# Altium PCB BAILEY.PcbDoc (part 6 of 8)
Units mil, origin at the board's own origin, x right, y up, seen from the top; angles counter-clockwise.
Board outline 6100 x 3000 mil, 4 copper layers (Signal Layer 1, Signal Layer 2, Signal Layer 3, Signal Layer 4), stack 59.904 mil thick; 167 components, 96 nets, 718 pads, 2907 vias.
Unrouted connection lines stored in the file: 1.
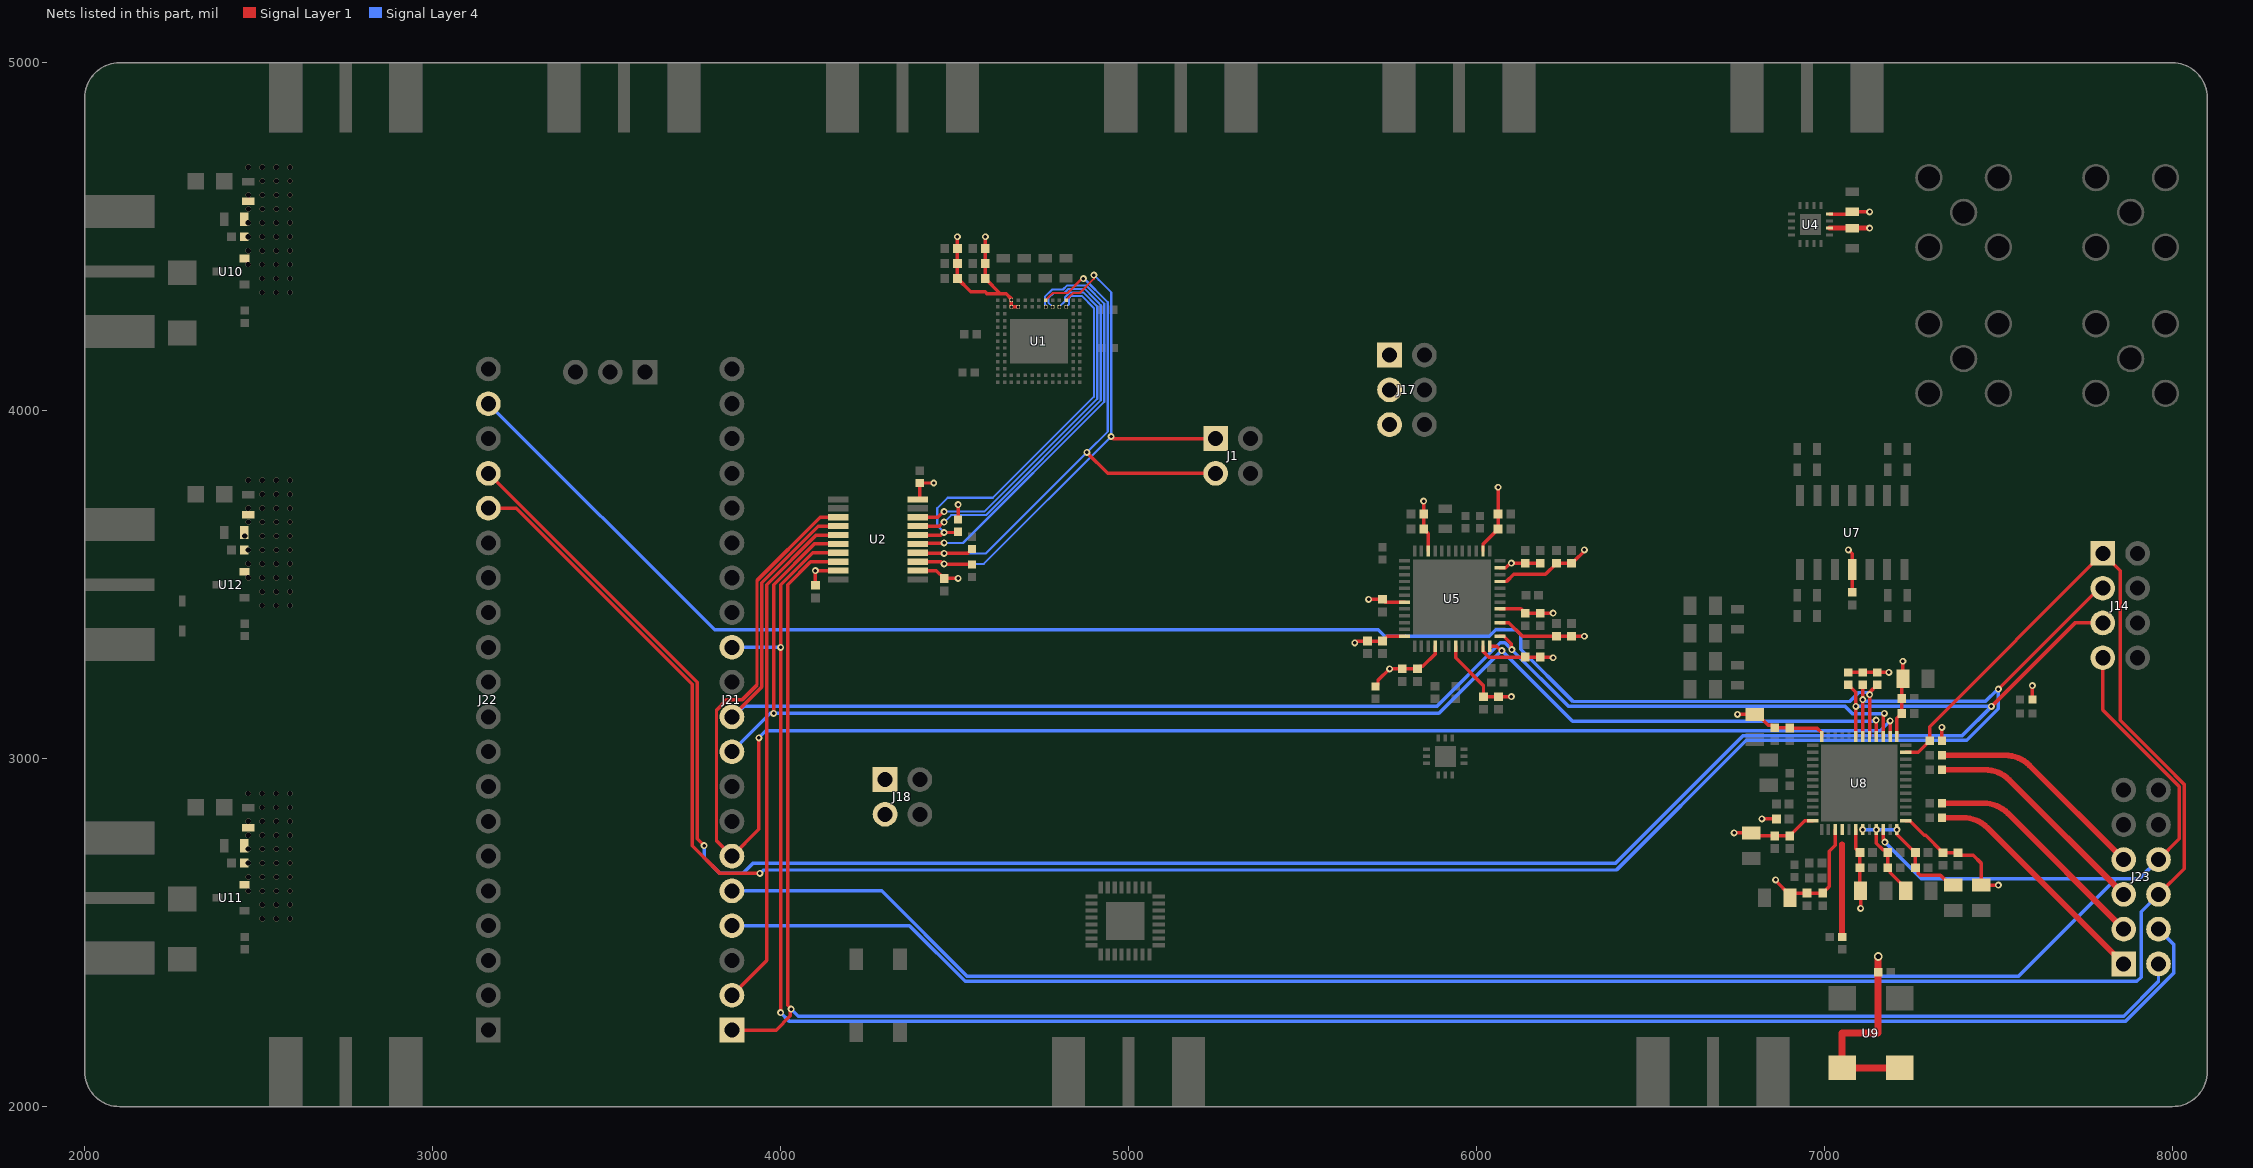
[diagram p4: the nets of this part, all layers, seen from the top]

## Part data (continued)
U3: "Splitter And Combiner, 0MHz Min, 18000MHz Max, 3.9dB Insertion Loss-Max, GAAS", Clock Frequency=18GHz, Manufacturer=Mini-Circuits, Max Operating Temperature=105°C, Min Operating Temperature=-55°C, Supplier Part Number=3157-EP2RKU+CT-ND, Bandwidth=18GHz, Category="NFC / RFID Components", ComponentLink1Description=https://datasheet.octopart.com:443/EP2RKU%2B-Mini-Circuits-datasheet-180700603.pdf?src-supplier=IHS, ComponentLink1URL=https://datasheet.octopart.com:443/EP2RKU%2B-Mini-Circuits-datasheet-180700603.pdf?src-supplier=IHS, ComponentLink2Description=https://datasheet.octopart.com:443/EP2RKU%2B-Mini-Circuits-datasheet-140829873.pdf?src-supplier=Upverter, ComponentLink2URL=https://datasheet.octopart.com:443/EP2RKU%2B-Mini-Circuits-datasheet-140829873.pdf?src-supplier=Upverter, ComponentLink3Description=https://sigma.octopart.com:443/139591504/technical_drawing/Mini-Circuits-EP2RKU%2B.pdf?src-supplier=Upverter, ComponentLink3URL=https://sigma.octopart.com:443/139591504/technical_drawing/Mini-Circuits-EP2RKU%2B.pdf?src-supplier=Upverter, Height=1mm, Impedance=50Ω, Insertion Loss (dB)=3.9dB, Lifecycle Status=Production, Manufacturer Part Number=EP2RKU+, Mounting Technology="Surface Mount", Number of Terminals=32, Pricing="1=37.19, 20=30.288, 50=29.9268 (USD)", RoHS=Compliant, Stock=2201, Supplier=DigiKey
U4: "SMT Lna, 5.5-15.5 Ghz, 50", Manufacturer=Mini-Circuits, Supplier Part Number=139-PMA3-5153+, Category="RF Amplifiers", Introduction Date=2024-06-24, Lifecycle Status=Production, Manufacturer Part Number=PMA3-5153+, Pricing="1=36.46, 10=33.05, 50=27.22, 100=24.74, 1000=24.63, 10000=24.63 (USD)", RoHS=Compliant, Stock=342, Supplier=Mouser
U5: "4GHz~10GHz 19dB 11dB QFN-48-EP(7x7) RF Modulators / Demodulator ROHS", Case/Package=VQFN, Frequency=10GHz, Manufacturer="Texas Instruments", Manufacturer Lifecycle Status=ACTIVE, Supplier Part Number=296-53223-1-ND, Category="RF Receivers, Transceivers", ComponentLink1Description=https://sigma.octopart.com:443/49249797/technical_drawing/Texas-Instruments-LMX8410RGZT.pdf?src-supplier=Texas+Instruments, ComponentLink1URL=https://sigma.octopart.com:443/49249797/technical_drawing/Texas-Instruments-LMX8410RGZT.pdf?src-supplier=Texas+Instruments, ComponentLink2Description=https://octopart.com:443/opatz8j6/c1?t=OSmSJJdNyKSbWqEw0vn8SIgfjq11nLHjtGgfLHRXvwfeMgF3TY_W6V8cFA1iHYYIOxC0JB7bHbIc4ZhsozsVMJli3TD6MJfYLuuyT7qGQcay5ot-dpFL0YZnHF23ZUpECGlIaOqZYS-_--WhL5WwkmL1f5pSpJKV6lYnSunmmDMtuF41zkfeYuxpGUnPa8VU9glOm5OV5MJuk4URxeiUVA1vu6wi3GZ-eSUaVnHSNvkDjkEVzksepbqIECkZ51v6n-bDohaiCp0rJydrV8ZXqdVDfu5t9teVCchDSMKaAW-RKjs78W6r6rYCspQdRpOoggdynM_4PcQHvtaA5v4WWRiyBUJ58a966Hsb4g0B5WZD8S-QOJnlBY18ViVbJ0UPjo9Qt7-Z&src-supplier=Texas+Instruments, ComponentLink2URL=https://octopart.com:443/opatz8j6/c1?t=OSmSJJdNyKSbWqEw0vn8SIgfjq11nLHjtGgfLHRXvwfeMgF3TY_W6V8cFA1iHYYIOxC0JB7bHbIc4ZhsozsVMJli3TD6MJfYLuuyT7qGQcay5ot-dpFL0YZnHF23ZUpECGlIaOqZYS-_--WhL5WwkmL1f5pSpJKV6lYnSunmmDMtuF41zkfeYuxpGUnPa8VU9glOm5OV5MJuk4URxeiUVA1vu6wi3GZ-eSUaVnHSNvkDjkEVzksepbqIECkZ51v6n-bDohaiCp0rJydrV8ZXqdVDfu5t9teVCchDSMKaAW-RKjs78W6r6rYCspQdRpOoggdynM_4PcQHvtaA5v4WWRiyBUJ58a966Hsb4g0B5WZD8S-QOJnlBY18ViVbJ0UPjo9Qt7-Z&src-supplier=Texas+Instruments, ComponentLink3Description=https://datasheet.octopart.com:443/LMX8410RGZT-Texas-Instruments-datasheet-166594463.pdf?src-supplier=Augswan, ComponentLink3URL=https://datasheet.octopart.com:443/LMX8410RGZT-Texas-Instruments-datasheet-166594463.pdf?src-supplier=Augswan, ComponentLink4Description=http://sigma.octopart.com:80/reach_statement/Texas-Instruments-company-64.pdf?src-supplier=Compliance+Statements, ComponentLink4URL=http://sigma.octopart.com:80/reach_statement/Texas-Instruments-company-64.pdf?src-supplier=Compliance+Statements, ComponentLink5Description=http://sigma.octopart.com:80/conflict_mineral_statement/Texas-Instruments-company-63.pdf?src-supplier=Compliance+Statements, ComponentLink5URL=http://sigma.octopart.com:80/conflict_mineral_statement/Texas-Instruments-company-63.pdf?src-supplier=Compliance+Statements, Copyright="Copyright (C) 2026 Ultra Librarian. All rights reserved.", Datasheet=https://www.ti.com/lit/gpn/lmx8410l, Height=1mm, Length=7mm, Lifecycle Status=Production, Manufacturer Part Number=LMX8410RGZT, Manufacturer_Name="Texas Instruments", Manufacturer_Part_Number=LMX8410RGZT, Pins=48, Pricing="1=134.16, 10=113.249, 25=108.0276 (USD)", RefDes=RefDes, RoHS=Compliant, Schedule B="8542390000, 8542390000|8542390000|8542390000|8542390000|8542390000", Stock=564, Supplier=DigiKey, Thickness=900µm, Type=Type, Width=7mm
U6: "RF Transformer, 5500MHz Min", Manufacturer=Mini-Circuits, Max Operating Temperature=85°C, Min Operating Temperature=-40°C, Supplier Part Number=3157-MTX2-143+CT-ND, Category=Transformers, ComponentLink1Description=https://datasheet.octopart.com:443/MTX2-143%2B-Mini-Circuits-datasheet-180702081.pdf?src-supplier=IHS, ComponentLink1URL=https://datasheet.octopart.com:443/MTX2-143%2B-Mini-Circuits-datasheet-180702081.pdf?src-supplier=IHS, Export Control Classification Number (ECCN) Code=EAR99, Height=890µm, Insertion Loss (dB)=2.5dB, Introduction Date=2017-08-24, Length=3mm, Lifecycle Status=Production, Manufacturer Part Number=MTX2-143+, Mounting Technology="Surface Mount", Pricing="1=16.09, 20=3.7485 (USD)", RoHS=Compliant, Stock=559, Supplier=DigiKey, Width=3mm
U7: "Quad, 5.5-V, 10-MHz, RRIO operational amplifier for cost-optimized applications 14-SOIC -40 to 125", Case/Package=SOIC, Manufacturer="Texas Instruments", Manufacturer Lifecycle Status=ACTIVE, Max Operating Temperature=125°C, Min Operating Temperature=-40°C, Supplier Part Number=296-47549-1-ND, Bandwidth=10MHz, Category="Amplifiers - Op Amps, Buffer, Instrumentation", ComponentLink1Description=https://sigma.octopart.com:443/182471030/technical_drawing/Texas-Instruments-TLV9064IDR.pdf?src-supplier=Texas+Instruments, ComponentLink1URL=https://sigma.octopart.com:443/182471030/technical_drawing/Texas-Instruments-TLV9064IDR.pdf?src-supplier=Texas+Instruments, ComponentLink2Description=https://octopart.com:443/opatz8j6/c1?t=b8RlzpfQG-h9uOWAabMAiPJWoCTgAwquZzec_BkdV6ZjMU2OI4YyppNX09BT2fM0gpcDMTQrYtgvce6_TtfmK4XZa-h4SQxM8TKEKMrJJktc7O_kAaPT_h62tC27hsW5hQAKMoGbKBjHibz2blvr-fhN1RVl1yW8EvD465A9BJDSrY_kRU3crDNophsG2nTX2Be3i9H2X4Kl0o-rARNMZYxgtWRCQAP9XVS_fu0jqO5PbtSNR57rXOk02X4GKKjnzDeVifR_OIS0uZ1j_pAkmvXspyYvhGUJvwUxZqgyekwRIScv7vrk5hgDM9rgOsgWHAf34DWgZgApfn4NaTTf5ebtlEHCtjJg6ABKjJ4CBoMZf9D-5muRZyk3ZTspSwA1lzBPrFk&src-supplier=Texas+Instruments, ComponentLink2URL=https://octopart.com:443/opatz8j6/c1?t=b8RlzpfQG-h9uOWAabMAiPJWoCTgAwquZzec_BkdV6ZjMU2OI4YyppNX09BT2fM0gpcDMTQrYtgvce6_TtfmK4XZa-h4SQxM8TKEKMrJJktc7O_kAaPT_h62tC27hsW5hQAKMoGbKBjHibz2blvr-fhN1RVl1yW8EvD465A9BJDSrY_kRU3crDNophsG2nTX2Be3i9H2X4Kl0o-rARNMZYxgtWRCQAP9XVS_fu0jqO5PbtSNR57rXOk02X4GKKjnzDeVifR_OIS0uZ1j_pAkmvXspyYvhGUJvwUxZqgyekwRIScv7vrk5hgDM9rgOsgWHAf34DWgZgApfn4NaTTf5ebtlEHCtjJg6ABKjJ4CBoMZf9D-5muRZyk3ZTspSwA1lzBPrFk&src-supplier=Texas+Instruments, ComponentLink3Description=https://sigma.octopart.com:443/49249646/technical_drawing/Texas-Instruments-TLV9064IDR.pdf?src-supplier=Texas+Instruments, ComponentLink3URL=https://sigma.octopart.com:443/49249646/technical_drawing/Texas-Instruments-TLV9064IDR.pdf?src-supplier=Texas+Instruments, ComponentLink4Description=https://datasheet.octopart.com:443/TLV9064IDR-Texas-Instruments-datasheet-101609303.pdf?src-supplier=Farnell, ComponentLink4URL=https://datasheet.octopart.com:443/TLV9064IDR-Texas-Instruments-datasheet-101609303.pdf?src-supplier=Farnell, ComponentLink5Description=https://datasheet.octopart.com:443/TLV9064IDR-Texas-Instruments-datasheet-160738807.pdf?src-supplier=LCSC, ComponentLink5URL=https://datasheet.octopart.com:443/TLV9064IDR-Texas-Instruments-datasheet-160738807.pdf?src-supplier=LCSC, ComponentLink6Description=https://datasheet.octopart.com:443/TLV9064IDR-Texas-Instruments-datasheet-159117845.pdf?src-supplier=LCSC, ComponentLink6URL=https://datasheet.octopart.com:443/TLV9064IDR-Texas-Instruments-datasheet-159117845.pdf?src-supplier=LCSC, ComponentLink7Description=http://sigma.octopart.com:80/reach_statement/Texas-Instruments-company-64.pdf?src-supplier=Compliance+Statements, ComponentLink7URL=http://sigma.octopart.com:80/reach_statement/Texas-Instruments-company-64.pdf?src-supplier=Compliance+Statements, ComponentLink8Description=http://sigma.octopart.com:80/conflict_mineral_statement/Texas-Instruments-company-63.pdf?src-supplier=Compliance+Statements, ComponentLink8URL=http://sigma.octopart.com:80/conflict_mineral_statement/Texas-Instruments-company-63.pdf?src-supplier=Compliance+Statements, Height=0m, Length=8.65mm, Lifecycle Status=Production, Manufacturer Part Number=TLV9064IDR, Number of Channels=4, Packaging="Cut Tape", Pins=14, Pricing="1=1.49, 10=1.085, 25=0.9844, 100=0.8739, 250=0.8212, 500=0.78944, 1000=0.76329 (USD)", RoHS=Compliant, Schedule B="8542330000, 8542330000|8542330000|8542330000|8542330000|8542330000", Slew Rate=6.5V/µs, Stock=4493, Supplier=DigiKey, Thickness=1.58mm, Width=3.91mm
U8: "4-Channel Quad ADC Delta-Sigma 1.8Msps 16-bit Parallel/Serial Automotive 48-Pin LFCSP EP T/R", Case/Package=QFN, Manufacturer="Analog Devices", Manufacturer Lifecycle Status="NOT RECOMMENDED FOR NEW DESIGN", Manufacturer_Name="Analog Devices Inc", Max Operating Temperature=125°C, Min Operating Temperature=-40°C, Supplier Part Number=ADAR7251WBCSZ-RL, Category="Analog to Digital Converters (ADCs)", ComponentLink1Description=https://datasheet.octopart.com:443/ADAR7251WBCSZ-RL-Analog-Devices-datasheet-37108182.pdf?src-supplier=Upverter, ComponentLink1URL=https://datasheet.octopart.com:443/ADAR7251WBCSZ-RL-Analog-Devices-datasheet-37108182.pdf?src-supplier=Upverter, ComponentLink2Description=https://octopart.com:443/opatz8j6/c1?t=CQmgxgzF3TS1DSQPN3cDiG0EYWfU1hgwPhmTexDVZLnR1yZQOElAuyPbML9mgDJkPVxpVD3gYcoY03UYbhc9VkRaca9L0HaHtXuMsNFf2r7kStaMExwc3y8Qy8XWZPSfY4husBBcSXxc0bo4wKO_VIhVldzI7K2uCW-t-YqmoWcieXASzNGiaG2Bub2XzkGmAw1BAALsiXjrYth_GIRcMxKMuexNTsFZxWzEW-RJC1yoCn1dh43rOqnwSWnkt7ugxSJEi6_2jxpsji6pZNy2X20IdN1ynU6w9VyR75RcBgi_pduDOVpUW0AX&src-supplier=Analog+Devices, ComponentLink2URL=https://octopart.com:443/opatz8j6/c1?t=CQmgxgzF3TS1DSQPN3cDiG0EYWfU1hgwPhmTexDVZLnR1yZQOElAuyPbML9mgDJkPVxpVD3gYcoY03UYbhc9VkRaca9L0HaHtXuMsNFf2r7kStaMExwc3y8Qy8XWZPSfY4husBBcSXxc0bo4wKO_VIhVldzI7K2uCW-t-YqmoWcieXASzNGiaG2Bub2XzkGmAw1BAALsiXjrYth_GIRcMxKMuexNTsFZxWzEW-RJC1yoCn1dh43rOqnwSWnkt7ugxSJEi6_2jxpsji6pZNy2X20IdN1ynU6w9VyR75RcBgi_pduDOVpUW0AX&src-supplier=Analog+Devices, ComponentLink3Description=https://datasheet.octopart.com:443/ADAR7251WBCSZ-RL-Analog-Devices-datasheet-79793795.pdf?src-supplier=SHENGYU+ELECTRONICS, ComponentLink3URL=https://datasheet.octopart.com:443/ADAR7251WBCSZ-RL-Analog-Devices-datasheet-79793795.pdf?src-supplier=SHENGYU+ELECTRONICS, ComponentLink4Description=http://sigma.octopart.com:80/conflict_mineral_statement/Analog-Devices-company-33.pdf?src-supplier=Compliance+Statements, ComponentLink4URL=http://sigma.octopart.com:80/conflict_mineral_statement/Analog-Devices-company-33.pdf?src-supplier=Compliance+Statements, ComponentLink5Description=https://octopart.com:443/opatz8j6/c1?t=QP5QRZ8fNHIlvGQJKDbEcehpvKXZdY016AwOjUrM50DrZC_R-f1Pg-EuaWOyKDZH9OBd7dWivR_i3nk3Xo26w2sGsBnPhkVsSzYG81pmL3ea60Kmr0a8UUo0ZL-YYfNFq7KTASlEeG1WvdeIoSBT5hBvzH64l4FkDtEivSQbImbmNw6Y08ax0d8WdYuFh5ejQZzFivnYTWpTOoJzNsRVn8w6iClEFe_CmzJzioseeE7rWrtas6d9CbFF5KEvx48S6-N7O0YoKKepe4BUbaANJTYqghQhF1t7el8qVACiHhz-ck11jaWvVU3U&src-supplier=Compliance+Statements, ComponentLink5URL=https://octopart.com:443/opatz8j6/c1?t=QP5QRZ8fNHIlvGQJKDbEcehpvKXZdY016AwOjUrM50DrZC_R-f1Pg-EuaWOyKDZH9OBd7dWivR_i3nk3Xo26w2sGsBnPhkVsSzYG81pmL3ea60Kmr0a8UUo0ZL-YYfNFq7KTASlEeG1WvdeIoSBT5hBvzH64l4FkDtEivSQbImbmNw6Y08ax0d8WdYuFh5ejQZzFivnYTWpTOoJzNsRVn8w6iClEFe_CmzJzioseeE7rWrtas6d9CbFF5KEvx48S6-N7O0YoKKepe4BUbaANJTYqghQhF1t7el8qVACiHhz-ck11jaWvVU3U&src-supplier=Compliance+Statements, Copyright="Copyright (C) 2025 Ultra Librarian. All rights reserved.", Datasheet=https://www.analog.com/media/en/technical-documentation/data-sheets/ADAR7251.pdf, Interface="Parallel, SPI", Lead Free="Contains Lead", Lifecycle Status=Production, Manufacturer Part Number=ADAR7251WBCSZ, Manufacturer_Part_Number=ADAR7251WBCSZ, Number of A/D Converters=4, Number of Bits=16, Number of Inputs=4, Packaging="Tape and Reel", Pins=48, Pricing="1=17.58, 10=17.31, 25=17.04, 100=16.77, 250=16.49, 500=16.22, 1000=15.95 (USD)", RefDes=RefDes, RoHS=Compliant, Sampling Rate=1.8Msps, Schedule B="8542390000, 8542390000|8542390000|8542390000|8542390000|8542390000", Stock=1518, Supplier="Arrow Electronics", Type=Type
U9: "LVCMOS Output Clock Oscillator, 50MHz Nom", Case/Package=SMD/SMT, Frequency="50 MHz", Frequency Stability="+-25 ppm", Load Capacitance=15pF, Manufacturer=Connor-Winfield, Max Operating Temperature=70°C, Max Supply Current=30mA, Max Supply Voltage=3.465V, Min Operating Temperature=-20°C, Min Supply Voltage=3.135V, Operating Supply Voltage=3.3V, Supplier Part Number=CW541CT-ND, Supply Voltage="3.3 V", Temperature Range="-20C to 70C", Body Material=Ceramic, Category=Oscillators, ComponentLink1Description=https://datasheet.octopart.com:443/CWX813-050.0M-Connor-Winfield-datasheet-14434119.pdf?src-supplier=IHS, ComponentLink1URL=https://datasheet.octopart.com:443/CWX813-050.0M-Connor-Winfield-datasheet-14434119.pdf?src-supplier=IHS, Fall Time=6ns, Height=1.2954mm, Lead Free="Lead Free", Length=7.0104mm, Lifecycle Status=Production, Manufacturer Part Number=CWX813-050.0M, Mounting Technology="Surface Mount", Nominal Supply Current=30mA, Number of Terminals=4, Output Type=LVCMOS, Pricing="1=4.46, 10=3.878, 25=3.6668, 50=3.5152, 100=3.37, 250=3.28952 (USD)", REACH SVHC=Yes, Rise Time=6ns, RoHS=Compliant, Stock=2464, Supplier=DigiKey, Width=5.0038mm
U10 U11 U12: "P-ch Mosfet SOT-23 20V 112MOHM @ 4.5V - Lead(pb) And Halogen Free", Case/Package=SOT-23, Continuous Drain Current (ID)=3.1A, Drain to Source Breakdown Voltage=-20V, Drain to Source Resistance=112mΩ, Gate to Source Voltage (Vgs)=8V, Input Capacitance=405pF, Manufacturer="Vishay Siliconix", Manufacturer Part Number=SI2301CDS-T1-GE3, Max Junction Temperature (Tj)=150°C, Max Power Dissipation=1.6W, Min Breakdown Voltage=20V, Min Operating Temperature=-55°C, Supplier Part Number=SI2301CDS-T1-GE3CT-ND, Threshold Voltage=-1V, Category=MOSFETs, China RoHS=Compliant, ComponentLink1Description=https://datasheet.octopart.com:443/SI2301CDS-T1-GE3-Vishay-datasheet-181471154.pdf?src-supplier=Newark, ComponentLink1URL=https://datasheet.octopart.com:443/SI2301CDS-T1-GE3-Vishay-datasheet-181471154.pdf?src-supplier=Newark, ComponentLink2Description=https://datasheet.octopart.com:443/SI2301CDS-T1-GE3-Vishay-datasheet-12510940.pdf?src-supplier=Newark, ComponentLink2URL=https://datasheet.octopart.com:443/SI2301CDS-T1-GE3-Vishay-datasheet-12510940.pdf?src-supplier=Newark, ComponentLink3Description=https://datasheet.octopart.com:443/SI2301CDS-T1-GE3-Vishay-datasheet-8434571.pdf?src-supplier=Newark, ComponentLink3URL=https://datasheet.octopart.com:443/SI2301CDS-T1-GE3-Vishay-datasheet-8434571.pdf?src-supplier=Newark, ComponentLink4Description=https://datasheet.octopart.com:443/SI2301CDS-T1-GE3-Vishay-datasheet-41341312.pdf?src-supplier=Newark, ComponentLink4URL=https://datasheet.octopart.com:443/SI2301CDS-T1-GE3-Vishay-datasheet-41341312.pdf?src-supplier=Newark, ComponentLink5Description=https://datasheet.octopart.com:443/SI2301CDS-T1-GE3-Vishay-datasheet-62318581.pdf?src-supplier=element14+APAC, ComponentLink5URL=https://datasheet.octopart.com:443/SI2301CDS-T1-GE3-Vishay-datasheet-62318581.pdf?src-supplier=element14+APAC, ComponentLink6Description=https://datasheet.octopart.com:443/SI2301CDS-T1-GE3-Vishay-datasheet-41195220.pdf?src-supplier=element14+APAC, ComponentLink6URL=https://datasheet.octopart.com:443/SI2301CDS-T1-GE3-Vishay-datasheet-41195220.pdf?src-supplier=element14+APAC, ComponentLink7Description=https://datasheet.octopart.com:443/SI2301CDS-T1-GE3.-Vishay-datasheet-78863653.pdf?src-supplier=element14+APAC, ComponentLink7URL=https://datasheet.octopart.com:443/SI2301CDS-T1-GE3.-Vishay-datasheet-78863653.pdf?src-supplier=element14+APAC, ComponentLink8Description=https://datasheet.octopart.com:443/SI2301CDS-T1-GE3-Vishay-datasheet-21269440.pdf?src-supplier=Farnell, ComponentLink8URL=https://datasheet.octopart.com:443/SI2301CDS-T1-GE3-Vishay-datasheet-21269440.pdf?src-supplier=Farnell, ComponentLink9Description=https://datasheet.octopart.com:443/SI2301CDS-T1-GE3-Vishay-datasheet-165585106.pdf?src-supplier=TME, ComponentLink9URL=https://datasheet.octopart.com:443/SI2301CDS-T1-GE3-Vishay-datasheet-165585106.pdf?src-supplier=TME, ComponentLink10Description=https://datasheet.octopart.com:443/SI2301CDS-T1-GE3-Vishay-datasheet-44060305.pdf?src-supplier=TME, ComponentLink10URL=https://datasheet.octopart.com:443/SI2301CDS-T1-GE3-Vishay-datasheet-44060305.pdf?src-supplier=TME, ComponentLink11Description=https://datasheet.octopart.com:443/SI2301CDS-T1-GE3-Vishay-Siliconix-datasheet-62309529.pdf?src-supplier=RS+(Formerly+Allied+Electronics), ComponentLink11URL=https://datasheet.octopart.com:443/SI2301CDS-T1-GE3-Vishay-Siliconix-datasheet-62309529.pdf?src-supplier=RS+(Formerly+Allied+Electronics), ComponentLink12Description=https://datasheet.octopart.com:443/SI2301CDS-T1-GE3-Vishay-datasheet-14188513.pdf?src-supplier=iiiC, ComponentLink12URL=https://datasheet.octopart.com:443/SI2301CDS-T1-GE3-Vishay-datasheet-14188513.pdf?src-supplier=iiiC, ComponentLink13Description=http://sigma.octopart.com:80/rohs_statement/Vishay-company-15.pdf?src-supplier=Compliance+Statements, ComponentLink13URL=http://sigma.octopart.com:80/rohs_statement/Vishay-company-15.pdf?src-supplier=Compliance+Statements, Contact Plating=Tin, Country of Origin="Mainland China", Drain to Source Voltage (Vdss)=-20V, Element Configuration=Single, Export Control Classification Number (ECCN) Code=EAR99, Fall Time=35ns, Height=1.12mm, Introduction Date=2008-07-29, Lead Free="Lead Free", Length=3.04mm, Lifecycle Status=NRND, Max Operating Temperature=150°C, Mounting Technology="Surface Mount", Nominal Vgs=-400mV, Number of Channels=1, Number of Elements=1, Number of Terminals=3, Packaging="Cut Tape", Pins=3, Power Dissipation=1.6W, Pricing="1=0.69, 10=0.425, 100=0.2731, 500=0.20736, 1000=0.18615, 3000=0.15917, 6000=0.14558, 9000=0.13865, 15000=0.13086, 21000=0.12625, 30000=0.12177, 75000=0.11875 (USD)", Radiation Hardening=No, Rds On Max=112mΩ, REACH SVHC=Yes, Rise Time=35ns, RoHS=Compliant, Schedule B="8541210080, 8541210080|8541210080, 8541210080|8541210080|8541210080, 8541210080|8541210080|8541210080|8541210080", Stock=103168, Supplier=DigiKey, Turn-Off Delay Time=30ns, Turn-On Delay Time=11ns, Weight=1.437803g, Width=1.4mm

## Via types
v1: diameter 13.78, hole 7.87, Signal Layer 1 to Signal Layer 4, tented both sides, 1913 vias
v2: diameter 15, hole 15, Signal Layer 1 to Signal Layer 4, 378 vias
v3: diameter 7.87, hole 7.87, Signal Layer 1 to Signal Layer 4, 335 vias
v4: diameter 20, hole 10, Signal Layer 1 to Signal Layer 4, 130 vias
v5: diameter 16, hole 16, Signal Layer 1 to Signal Layer 4, 96 vias
v6: diameter 12, hole 12, Signal Layer 1 to Signal Layer 4, 49 vias
v7: diameter 196.85, hole 125.98, Signal Layer 1 to Signal Layer 4, 4 vias
v8: diameter 25, hole 15, Signal Layer 1 to Signal Layer 4, 2 vias

## Nets (pads, with @x,y where several pads share a name; then routed paths per layer and width w, separated by ;. In a path a pad name is that pad's centre, name@x,y a point inside that pad or via, vN(x,y) a via of type N, cw(c..) or ccw(c..) an arc to the next point about the centre after c; other vN are vias at no path point)
1V8: C11.2 C82.2 C83.2 J18.1 J18.2 R7.1 R8.1 R40.1 U2.2 U2.10 U12.2 | length 258
  Signal Layer 1 w10: U2.2@4394.17,3540.43 4447.68,3540.43 C11.2@4470,3518.11 v4(4510,3518.11) ; U2.10@4394.17,3745.16 4396.14,3745.16 4400,3749.02 R8.1@4400,3792.28 v4(4440,3792.28) ; R7.1@4510,3687.72 v4(4510,3730)
  other v2: 2510,3440 2550,3440 2590,3440 2510,3480 2550,3480 2590,3480 2470,3520 2510,3520 2550,3520 2590,3520 2470,3560 2510,3560 2550,3560 2590,3560 2470,3600 2510,3600 2550,3600 2590,3600 2460,3640 2510,3640 2550,3640 2590,3640 2470,3680 2510,3680 2550,3680 2590,3680 2470,3720 2510,3720 2550,3720 2590,3720 2510,3760 2550,3760 2590,3760 2470,3800 2510,3800 2550,3800 2590,3800
3V3: C5.1 C6.2 C7.1 C8.1 C9.2 C10.1 C12.1 C15.2 C16.1 C18.2 C19.1 C20.2 C21.2 C22.1 C26.2 C27.1 C28.2 C29.1 C30.2 C31.1 C32.2 C33.1 C34.2 C35.1 C40.2 C41.2 C42.2 C43.2 C44.2 C45.2 C46.2 C47.2 C48.2 C49.2 C51.1 C58.2 C60.2 C62.2 C63.2 C64.2 C65.2 C66.2 C68.2 C69.2 C77.2 C80.2 C81.2 J17.2 J17.3 R10.2 R26.2 R27.2 R28.2 R29.2 R30.2 R39.1 U1.M10 U1.M11 U1.N11 U2.19 U5.7 U5.12 U5.16 U5.19 U5.27 U5.29 U5.33 U5.35 U5.46 U7.4 U8.12 U8.15 U8.18 U8.25 U8.37 U8.48 U9.1 U9.4 U11.2 | length 5018.4
  Signal Layer 1 w10: C12.1@4100,3498.11 v4(4100,3540.43) U2.19@4165.83,3540.43 ; C10.1@4508.11,4380 4546.39,4341.72 4587.67,4341.72 4592.95,4336.45 4631.66,4336.45 ; C10.1@4508.11,4391.81 v4(4508.11,4500) ; v4(4588.11,4500) C5.1@4588.11,4466.41 C7.1@4588.11,4380 4631.66,4336.45 ; v3(4683.07,4298.43) v3(4663.39,4298.43) v3(4663.39,4318.11) 4663.39,4321.15 4648.09,4336.45 4631.66,4336.45 ; v4(5650,3332.73) 5652.44,3332.73 5657.82,3338.11 C19.1@5686.8,3338.11 C18.2@5730,3338.11 5743.62,3351.73 U5.12@5793,3351.73 ; v4(5690,3458.11) C20.2@5730,3458.11 5737.95,3450.16 U5.7@5793,3450.16 ; R10.2@5710,3207.72 5716.81,3214.53 5716.81,3224.92 v4(5750,3258.11) C29.1@5786.8,3258.11 C28.2@5830,3258.11 5837.6,3265.71 5845.71,3265.71 5880.79,3300.79 U5.16@5880.79,3323 ; v4(5848.11,3740) C31.1@5848.11,3703.2 C30.2@5848.11,3660 5861.1,3647.01 U5.46@5861.1,3597 ; U5.19@5939.84,3323 5939.84,3290.16 6020,3210 C15.2@6020,3178.11 C16.1@6063.2,3178.11 v4(6100,3178.11) ; U5.27@6067,3391.1 6092.86,3391.1 6132.08,3351.89 C26.2@6230,3351.89 C27.1@6273.2,3351.89 v4(6310,3351.89) ; U5.29@6067,3430.47 6127.64,3430.47 C32.2@6140,3418.11 C33.1@6183.2,3418.11 v4(6220,3418.11) ; U5.33@6067,3509.21 6086.04,3509.21 6106.83,3530 6198.11,3530 C34.2@6230,3561.89 C35.1@6273.2,3561.89 6280.8,3569.49 6282.5,3569.49 6308.09,3595.08 6308.09,3598.09 v4(6310,3600) ; U5.35@6067,3548.58 6083.99,3548.58 6097.29,3561.89 v4(6100,3561.89) C21.2@6140,3561.89 C22.1@6183.2,3561.89 ; v4(6740,2786.42) C44.2@6790,2786.42 6798.31,2778.11 C45.2@6856.8,2778.11 C46.2@6900,2778.11 6943.62,2821.73 U8.12@6966.24,2821.73 ; v4(6750,3127.47) C41.2@6799.63,3127.48 6807.5,3127.48 6838.74,3096.24 6849.2,3096.24 C42.2@6856.8,3088.64 6857.07,3088.38 6899.73,3088.38 C43.2@6900,3088.11 6978.32,3088.11 6991.73,3074.7 U8.48@6991.73,3063.76 ; v4(6820,2826.8) C51.1@6861.89,2826.8 ; v4(6859.8,2651.38) 6859.8,2649.1 6900.7,2608.2 C66.2@6900.7,2600.32 6913.98,2613.61 C68.2@6950,2613.61 C69.2@6995.08,2613.61 7014.2,2632.72 7014.2,2734.2 7031.1,2751.1 U8.15@7031.1,2796.24 ; R28.2@7068.38,3247.72 R27.2@7110,3247.72 R29.2@7151.62,3247.72 v4(7185,3247.72) ; v4(7068.91,3600) 7069.21,3600 7080,3589.21 U7.4@7080,3543.7 C40.2@7080,3478.11 ; U8.18@7090.16,2796.24 7090.16,2741.73 C49.2@7101.89,2730 C48.2@7101.89,2686.8 7101.89,2621.69 C47.2@7103.58,2620 v4(7103.58,2570) ; U8.37@7208.27,3063.76 7208.27,3116.38 C65.2@7221.89,3130 C64.2@7221.89,3173.2 7221.89,3227.06 C63.2@7225.2,3230.37 v4(7225.2,3280) ; U8.25@7233.76,2821.73 7244.7,2821.73 7286.92,2779.51 7291,2779.51 C62.2@7340.72,2729.78 C60.2@7383.92,2729.78 7390.83,2722.88 7427.12,2722.88 7450,2700 C58.2@7450,2636.42 v4(7500,2636.42) ; R26.2@7337.72,3051.49 v4(7337.72,3090) ; R30.2@7597.72,3170 v4(7597.72,3210)
  Signal Layer 1 w20: v8(7154.4,2431.42) 7154.4,2211.42 7050.79,2211.42 U9.4@7050.79,2111.42 U9.1@7216.14,2111.42
  other v2: 2510,2540 2550,2540 2590,2540 2510,2580 2550,2580 2590,2580 2470,2620 2510,2620 2550,2620 2590,2620 2470,2660 2510,2660 2550,2660 2590,2660 2470,2700 2510,2700 2550,2700 2590,2700 2470,2740 2510,2740 2550,2740 2590,2740 2470,2780 2510,2780 2550,2780 2590,2780 2470,2820 2510,2820 2550,2820 2590,2820 2510,2860 2550,2860 2590,2860 2470,2900 2510,2900 2550,2900 2590,2900
5V: C13.2 C14.2 C36.2 C37.1 C38.2 C39.1 C78.2 C79.2 J17.1 R38.1 U4.14 U4.16 U5.23 U5.38 U10.2 | length 657
  Signal Layer 1 w10: U5.23@6018.58,3323 6018.58,3308.96 6035.65,3291.89 6064.8,3291.89 6064.91,3291.78 6080.65,3291.78 6080.76,3291.89 C39.1@6140,3291.89 C38.2@6183.2,3291.89 6184.14,3290.94 6219.06,3290.94 v4(6220,3290) ; U5.38@6018.58,3597 6018.58,3616.69 C36.2@6061.89,3660 C37.1@6061.89,3703.2 v4(6061.89,3780.03) ; U4.16@7015,4565 7073.74,4565 C13.2@7080,4571.26 v4(7130,4571.26)
  Signal Layer 1 w15: U4.14@7015,4525 C14.2@7080,4525 v4(7130,4525)
  other v2: 2510,4340 2550,4340 2590,4340 2510,4380 2550,4380 2590,4380 2470,4420 2510,4420 2550,4420 2590,4420 2470,4460 2510,4460 2550,4460 2590,4460 2470,4500 2510,4500 2550,4500 2590,4500 2470,4540 2510,4540 2550,4540 2590,4540 2470,4580 2510,4580 2550,4580 2590,4580 2470,4620 2510,4620 2550,4620 2590,4620 2510,4660 2550,4660 2590,4660 2470,4700 2510,4700 2550,4700 2590,4700
ADC_CONV_START_N: J14.1 J21.4 J23.9 R26.1 U8.35 | length 6314.1
  Signal Layer 1 w10: U8.35@7233.76,3018.58 7269.38,3018.58 R26.1@7302.28,3051.49 7302.28,3092.28 J14.1@7800,3590 7850,3540 7850,3110 7978.91,2981.09 8034,2925.8 8034,2684 J23.9@7960,2610
  Signal Layer 4 w10: J21.4@3860,2520 4370.2,2520 4530.2,2360 7897.7,2360 7910,2372.3 7910,2560 J23.9@7960,2610
ADC_DATA_READY: J14.4 J21.5 J23.10 U8.22 | length 5783.6
  Signal Layer 1 w10: U8.22@7168.9,2796.24 7168.9,2767.17 7173.51,2762.56 v4(7173.51,2759.85) ; J14.4@7800,3290 7800,3140 8017.07,2922.93 8020,2920 8020,2770 J23.10@7960,2710
  Signal Layer 4 w10: J21.5@3860,2620 4290,2620 4536,2374 7557.01,2374 7838.49,2655.48 ; v4(7173.51,2759.85) 7173.81,2759.85 7278.18,2655.48 7838.49,2655.48 ; J23.10@7960,2710 7905.48,2655.48 7838.49,2655.48
ADC_DOUT0: J23.1 R23.2 | length 692.1
  Signal Layer 1 w16.65: R23.2@7337.72,2830.45 7398.13,2830.45 cw(c7398.13,2730.45) 7468.84,2801.16 J23.1@7860,2410
ADC_DOUT1: J23.2 R24.2 | length 668
  Signal Layer 1 w16.65: R24.2@7337.72,2872.07 7456.51,2872.07 cw(c7456.51,2772.07) 7527.22,2842.78 J23.2@7860,2510
ADC_FAULT_N: J14.2 J22.16 R27.1 U8.42 | length 6274.8
  Signal Layer 1 w10: J22.16@3160,3720 3240,3720 3746,3214 3746,2749.57 3825.57,2670 v4(3940,2670) ; U8.42@7109.84,3063.76 7109.92,3063.83 7109.92,3169.92 v4(7110,3170) R27.1@7110,3212.28 ; v4(7500,3200) 7790,3490 J14.2@7800,3490
  Signal Layer 4 w10: v4(3940,2670) 3940.86,2670 3950.86,2680 6402.23,2680 6774.74,3052.51 7409.38,3052.51 7500,3143.13 v4(7500,3200) 7497.57,3200 7462.93,3165.35 7117.35,3165.35 7112.71,3170 v4(7110,3170)
ADC_FS_ADC: J23.3 R32.1 | length 666.4
  Signal Layer 1 w16.65: R32.1@7337.72,2968.24 7460.33,2968.24 cw(c7460.33,2868.24) 7531.04,2938.96 J23.3@7860,2610
ADC_MCLKIN: R34.2 R35.2 U8.16 | length 266.5
  Signal Layer 1 w16.65: R34.2@7050.79,2487.72 7050.79,2754.18
ADC_RST_N: J14.3 J22.17 R28.1 U8.43 | length 6245.9
  Signal Layer 1 w10: J22.17@3160,3820 3760,3220 3760,2770 v4(3780,2750) ; R28.1@7068.38,3212.28 7090,3190.66 v4(7090,3150) 7090.08,3149.92 7090.08,3063.83 U8.43@7090.16,3063.76 ; v4(7480,3150) 7720,3390 J14.3@7800,3390
  Signal Layer 4 w10: v4(3780,2750) 3780,2715.57 3825.57,2670 3891.24,2670 3921.24,2700 6400,2700 6766.51,3066.51 7396.51,3066.51 v4(7480,3150) v4(7090,3150)
ADC_SCLK: J23.4 R25.2 | length 642.2
  Signal Layer 1 w16.65: R25.2@7337.72,3009.87 7518.71,3009.87 cw(c7518.71,2909.87) 7589.42,2980.58 J23.4@7860,2710
ADC_SPI_CLK: J21.9 U2.16 U5.24 U8.40 | length 4187.2
  Signal Layer 1 w10: v4(3980,3130) 3980,3500 4097.2,3617.2 U2.16@4165.83,3617.2 ; U5.24@6038.27,3323 6058.27,3323 6070.49,3310.78 v4(6072.78,3310.78) ; v4(7148.56,3110.74) 7149.12,3110.18 7149.12,3063.85 U8.40@7149.21,3063.76
  Signal Layer 4 w10: J21.9@3860,3020 J21.9@3861.07,3021.07 ; J21.9@3862.14,3020 J21.9@3861.07,3021.07 ; v4(7148.56,3110.74) 7146.65,3108.82 7139.57,3108.82 7138.36,3107.61 6275.95,3107.61 v4(6072.78,3310.78) 5892,3130 v4(3980,3130) 3970,3130 J21.9@3861.07,3021.07
ADC_SPI_CS: J22.19 R29.1 U8.41 | length 4535.6
  Signal Layer 1 w10: U8.41@7129.53,3063.76 v4(7129.53,3184.35) 7129.53,3190.19 R29.1@7151.62,3212.28
  Signal Layer 4 w10: J22.19@3160,4020 3810,3370 5717.4,3370 5735.67,3351.73 6036.31,3351.73 6055.62,3371.03 6112.93,3371.03 6127.4,3356.56 6127.4,3314.25 6277.36,3164.29 7073.1,3164.29 7099.01,3190.2 7120.98,3190.2 7126.82,3184.35 v4(7129.53,3184.35)
ADC_SPI_MISO: J21.6 U2.13 U8.38 | length 4882
  Signal Layer 1 w10: v4(3937.12,3060) 3937.12,2797.12 J21.6@3860,2720 3815.57,2764.43 3815.57,3139.71 3845.86,3170 3890.2,3170 3932,3211.8 3932,3512 4113.98,3693.98 U2.13@4165.83,3693.98 ; U8.38@7188.58,3063.76 v4(7188.58,3108.45)
  Signal Layer 4 w10: v4(3937.12,3060) 3957.64,3080.51 7160.65,3080.51 v4(7188.58,3108.45)
ADC_SPI_MOSI: J21.10 U2.14 U5.25 U8.39 | length 4320.4
  Signal Layer 1 w10: J21.10@3860,3120 3946,3206 3946,3506 4108.39,3668.39 U2.14@4165.83,3668.39 ; U5.25@6067,3351.73 6078,3351.73 6099.37,3330.36 6099.37,3315.41 v4(6101.29,3313.5) ; U8.39@7168.9,3063.76 7168.9,3123.91 7172.41,3127.42 v4(7172.41,3130.13)
  Signal Layer 4 w10: J21.10@3860,3120 3863.04,3120 3893.04,3150 5885.13,3150 6068.13,3333 6081.78,3333 v4(6101.29,3313.5) 6264.78,3150 7060,3150 7080.26,3129.74 7172.01,3129.74 v4(7172.41,3130.13)
BEAMFORMER_SPI_CLK_1: U1.M6 U2.5 | length 1222.6
  Signal Layer 1 w10: U2.5@4394.17,3617.2 4395.57,3618.6 4468.6,3618.6 v4(4470,3620)
  Signal Layer 4 w6: v4(4470,3620) 4524.14,3620 4930,4025.86 4930,4307.74 4877.63,4360.11 4823.15,4360.11 4811.5,4348.45 4780.73,4348.45 4759.5,4327.22 4759.5,4306.28 4761.45,4304.33 4761.45,4298.78 v3(4761.81,4298.43)
BEAMFORMER_SPI_CS: J21.2 U2.15 | length 1486.4
  Signal Layer 1 w10: J21.2@3860,2320 3960,2420 3960,3500 4102.8,3642.8 U2.15@4165.83,3642.8
BEAMFORMER_SPI_CSB_1: R7.2 U1.M3 U2.6 | length 1152.5
  Signal Layer 1 w10: U2.6@4394.17,3642.8 4460.09,3642.8 4467.29,3650 4507.72,3650 R7.2@4510,3652.28
  Signal Layer 4 w6: v4(4470,3650) 4450,3670 4450,3720 4480,3750 4610,3750 4900,4040 4900,4295.32 4865.21,4330.11 4835.58,4330.11 4828.55,4323.08 4828.55,4306.11 v3(4820.87,4298.43)
BEAMFORMER_SPI_SDIO_1: U1.M5 U2.7 | length 1159.8
  Signal Layer 1 w10: U2.7@4394.17,3668.39 4455.68,3668.39 4467.29,3680 v4(4470,3680)
  Signal Layer 4 w6: v4(4470,3680) 4490,3700 4590,3700 4920,4030 4920,4303.6 4912.58,4311.02 4900.65,4322.95 4873.49,4350.11 4827.3,4350.11 4815.64,4338.45 4784.87,4338.45 4769.5,4323.08 4769.5,4310.43 v3(4781.5,4298.43)
BEAMFORMER_SPI_SDO_1: U1.M4 U2.8 | length 1071.4
  Signal Layer 1 w10: U2.8@4394.17,3693.98 4451.27,3693.98 4467.29,3710 v4(4470,3710)
  Signal Layer 4 w6: v4(4470,3710) 4585.45,3710 4910,4034.55 4910,4299.46 4869.35,4340.11 4831.44,4340.11 4816.69,4325.36 4816.69,4313.94 v3(4801.18,4298.43)
BEAMFORMER_TR: J21.12 J23.8 U2.17 | length 5789.6
  Signal Layer 1 w10: v4(4000,2270) v4(4000,3320) 4000,3500 4091.95,3591.95 4165.49,3591.95 U2.17@4165.83,3591.61
  Signal Layer 4 w10: J21.12@3860,3320 v4(4000,3320) ; v4(4000,2270) 4024,2246 7865.8,2246 8004.43,2384.63 8004.43,2465.57 J23.8@7960,2510
BEAMFORMER_TR_1: J1.2 R6.2 U1.N6 U2.4 | length 1775.5
  Signal Layer 1 w6: U1.N6@4761.81,4318.11 4769.35,4325.65 4769.35,4325.87 4781.94,4338.45 4824.66,4338.45 4866.21,4380 v4(4870,4380)
  Signal Layer 1 w10: U2.4@4394.17,3591.61 4394.98,3590.81 4469.19,3590.81 v4(4470,3590) 4537.72,3590 R6.2@4550,3602.28 ; v4(4880,3880) 4940,3820 J1.2@5250,3820
  Signal Layer 4 w6: v4(4470,3590) 4590,3590 v4(4880,3880) 4940,3940 4940,4311.89 4871.89,4380 v4(4870,4380)
BEAMFORMER_TX_LOAD: J21.1 J23.7 U2.18 | length 5632.1
  Signal Layer 1 w10: J21.1@3860,2220 3987.29,2220 4028.09,2260.8 4028.09,2278.09 v4(4030,2280) 4030,2280.86 4020,2290.86 4020,3500.2 4085.82,3566.02 U2.18@4165.83,3566.02
  Signal Layer 4 w10: v4(4030,2280) 4050,2260 7860,2260 7960,2360 J23.7@7960,2410
BEAMFORMER_TX_LOAD_1: J1.1 R5.2 U1.N3 U2.3 | length 1693.6
  Signal Layer 1 w6: U1.N3@4820.87,4318.11 4828.41,4325.65 4828.41,4325.87 4840.99,4338.45 4859.45,4338.45 4900,4379 v4(4900,4390)
  Signal Layer 1 w10: U2.3@4394.17,3566.02 4461.27,3566.02 4467.29,3560 v4(4470,3560) 4471.14,3558.86 4548.86,3558.86 R5.2@4550,3557.72 ; v4(4950,3925.96) 4955.96,3920 J1.1@5250,3920
  Signal Layer 4 w6: v4(4470,3560) 4584.04,3560 v4(4950,3925.96) 4950,4340 4913.71,4376.29 v4(4900,4390)
DVDD_6: C52.2 C53.2 C54.2 C55.2 C56.2 C57.2 U8.19 U8.21 U8.24 | length 578.5
  Signal Layer 1 w10: v4(7149.21,2796.24) 7149.21,2757.28 7168.89,2737.6 7174.29,2737.6 C54.2@7181.89,2730 C53.2@7181.89,2686.8 7189.49,2679.2 7189.49,2671.97 7233.58,2627.87 C52.2@7233.58,2620 ; v4(7208.27,2796.24) 7208.27,2783.04 C57.2@7261.31,2730 C56.2@7261.31,2686.8 7268.91,2679.2 7268.91,2671.06 7274.76,2665.2 7333.34,2665.2 7362.13,2636.42 C55.2@7370,2636.42
  Signal Layer 4 w10: v4(7109.84,2796.24) v4(7149.21,2796.24) v4(7208.27,2796.24)